# Altium PCB RGBlink.PcbDoc (part 1 of 2)
Units mm, origin at the board's own origin, x right, y up, seen from the top; angles counter-clockwise.
Board outline 49.44 x 43.42 mm, 2 copper layers (Top Layer, Bottom Layer), stack 1.621 mm thick; 42 components, 36 nets, 160 pads, 110 vias.
Unrouted connection lines stored in the file: 1.
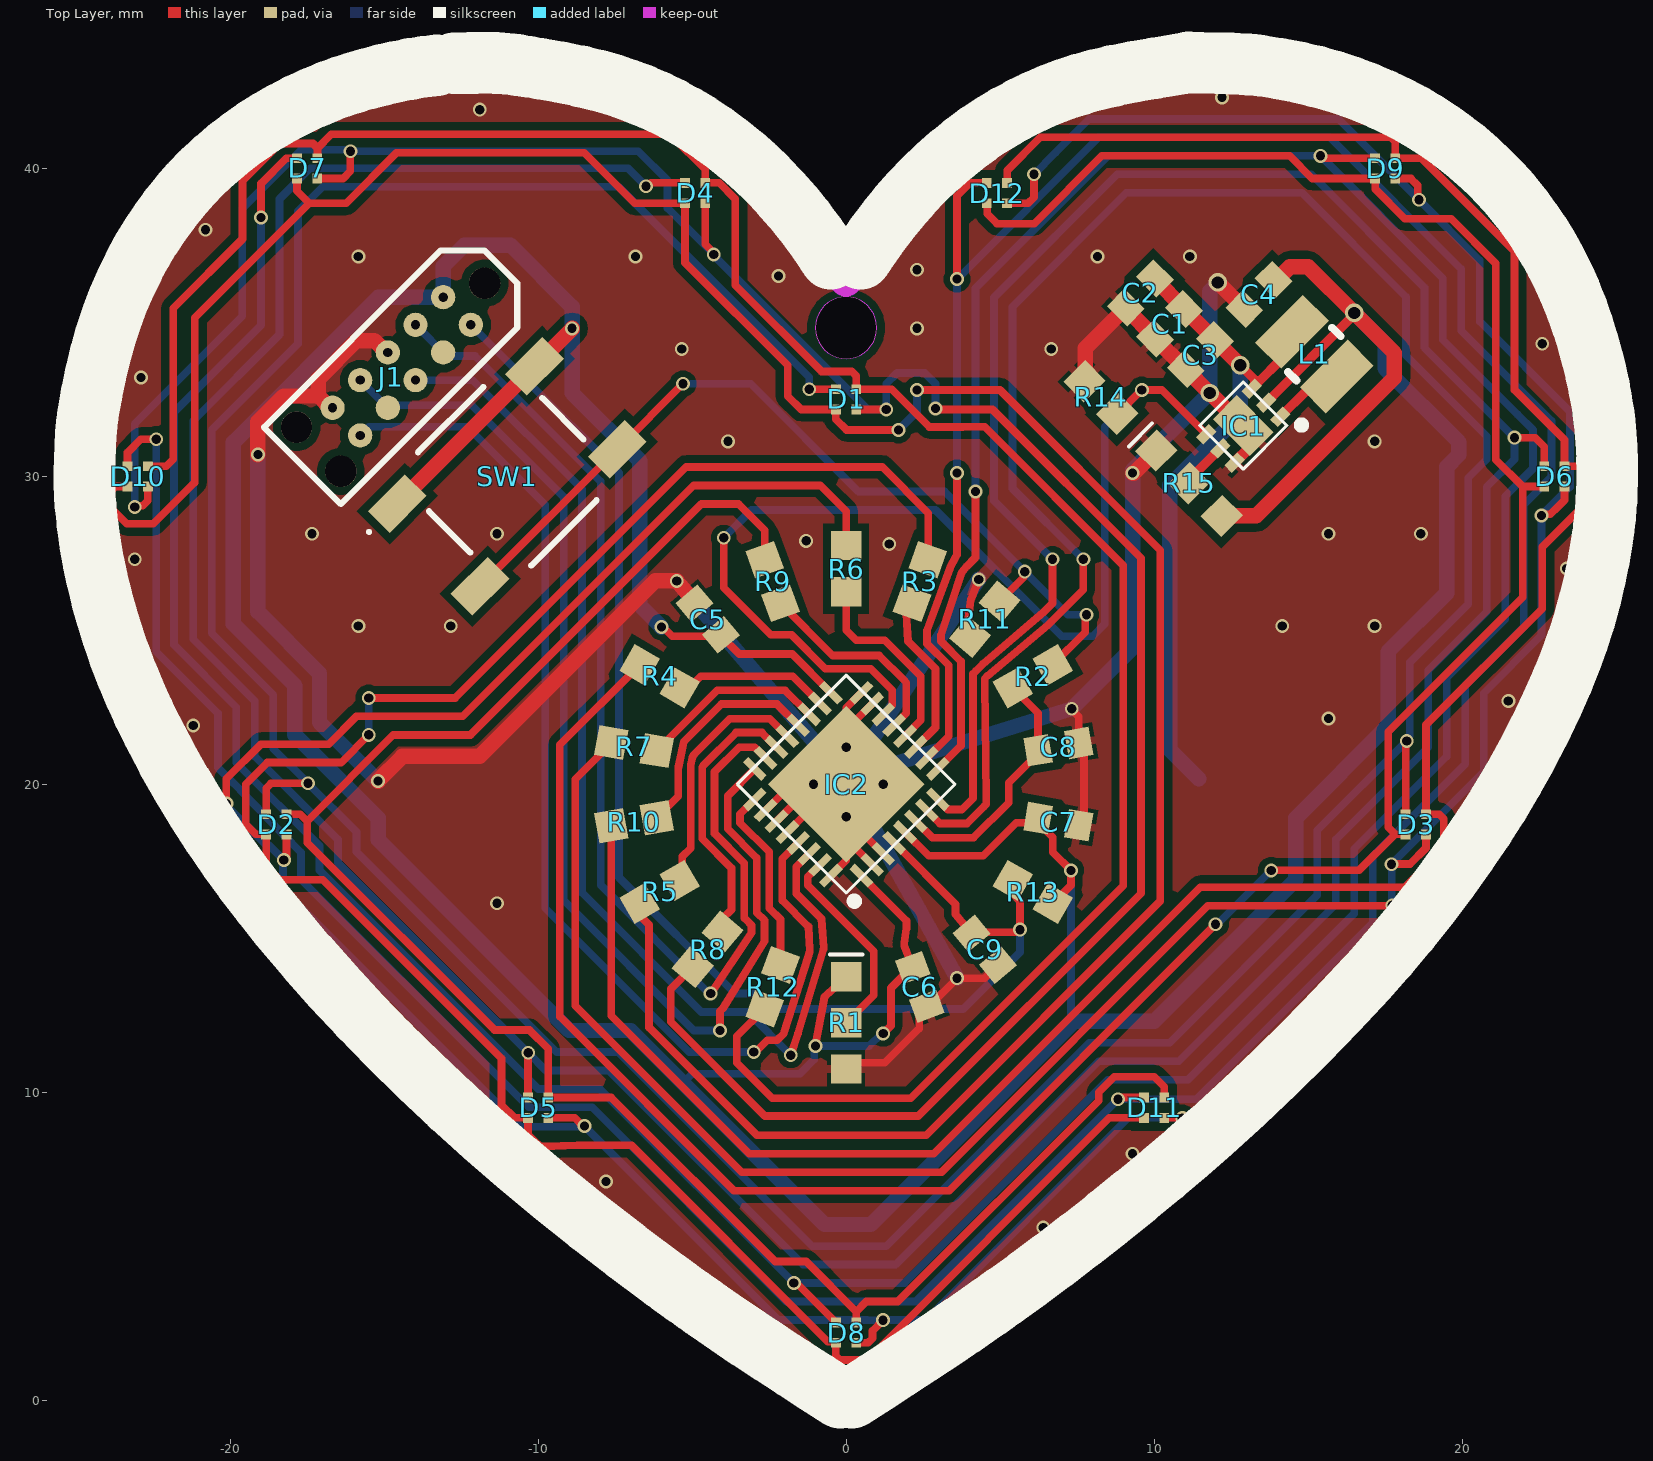
[diagram p0: Top Layer view]
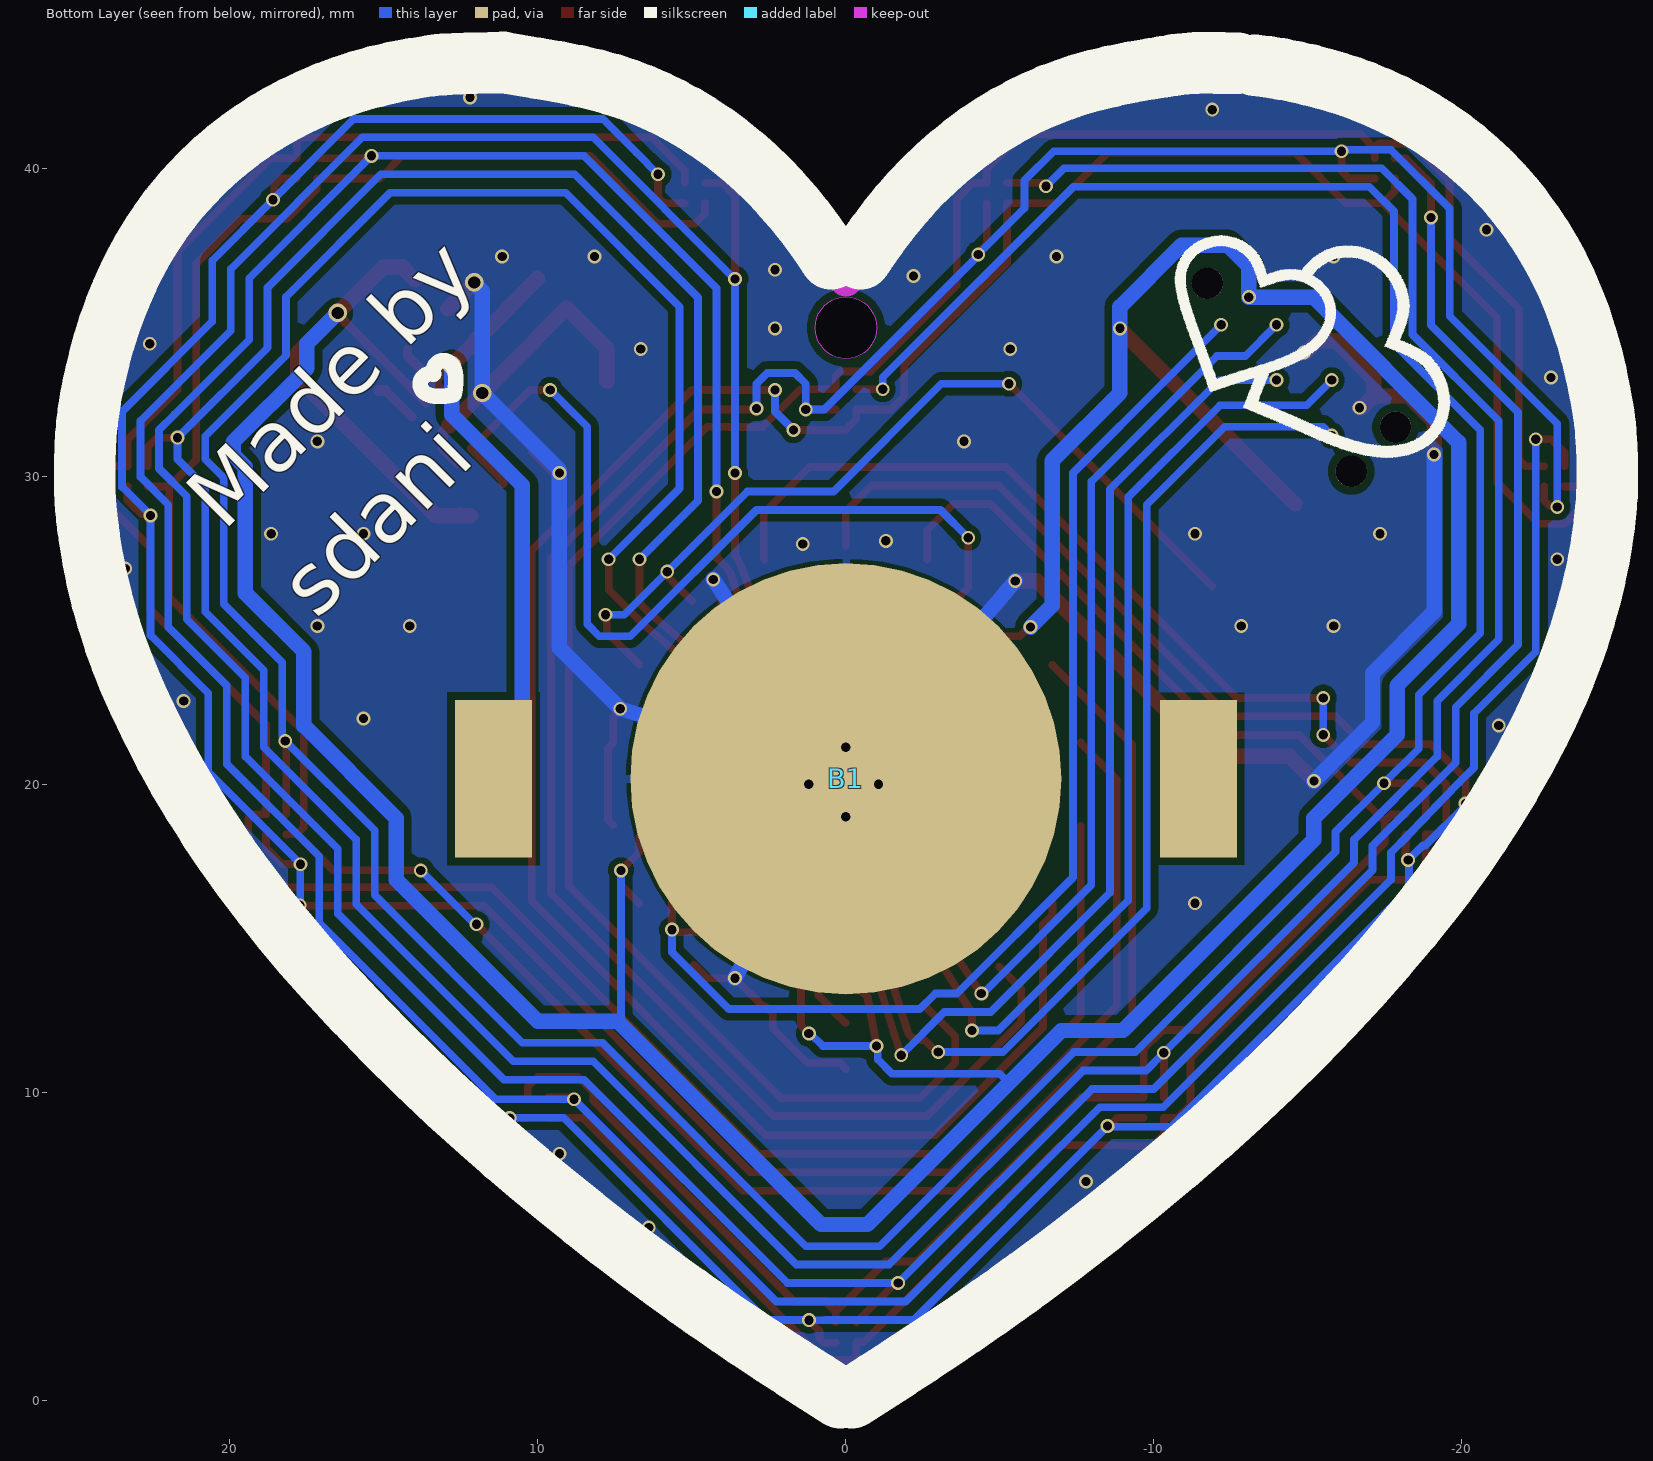
[diagram p1: Bottom Layer view, seen from below]
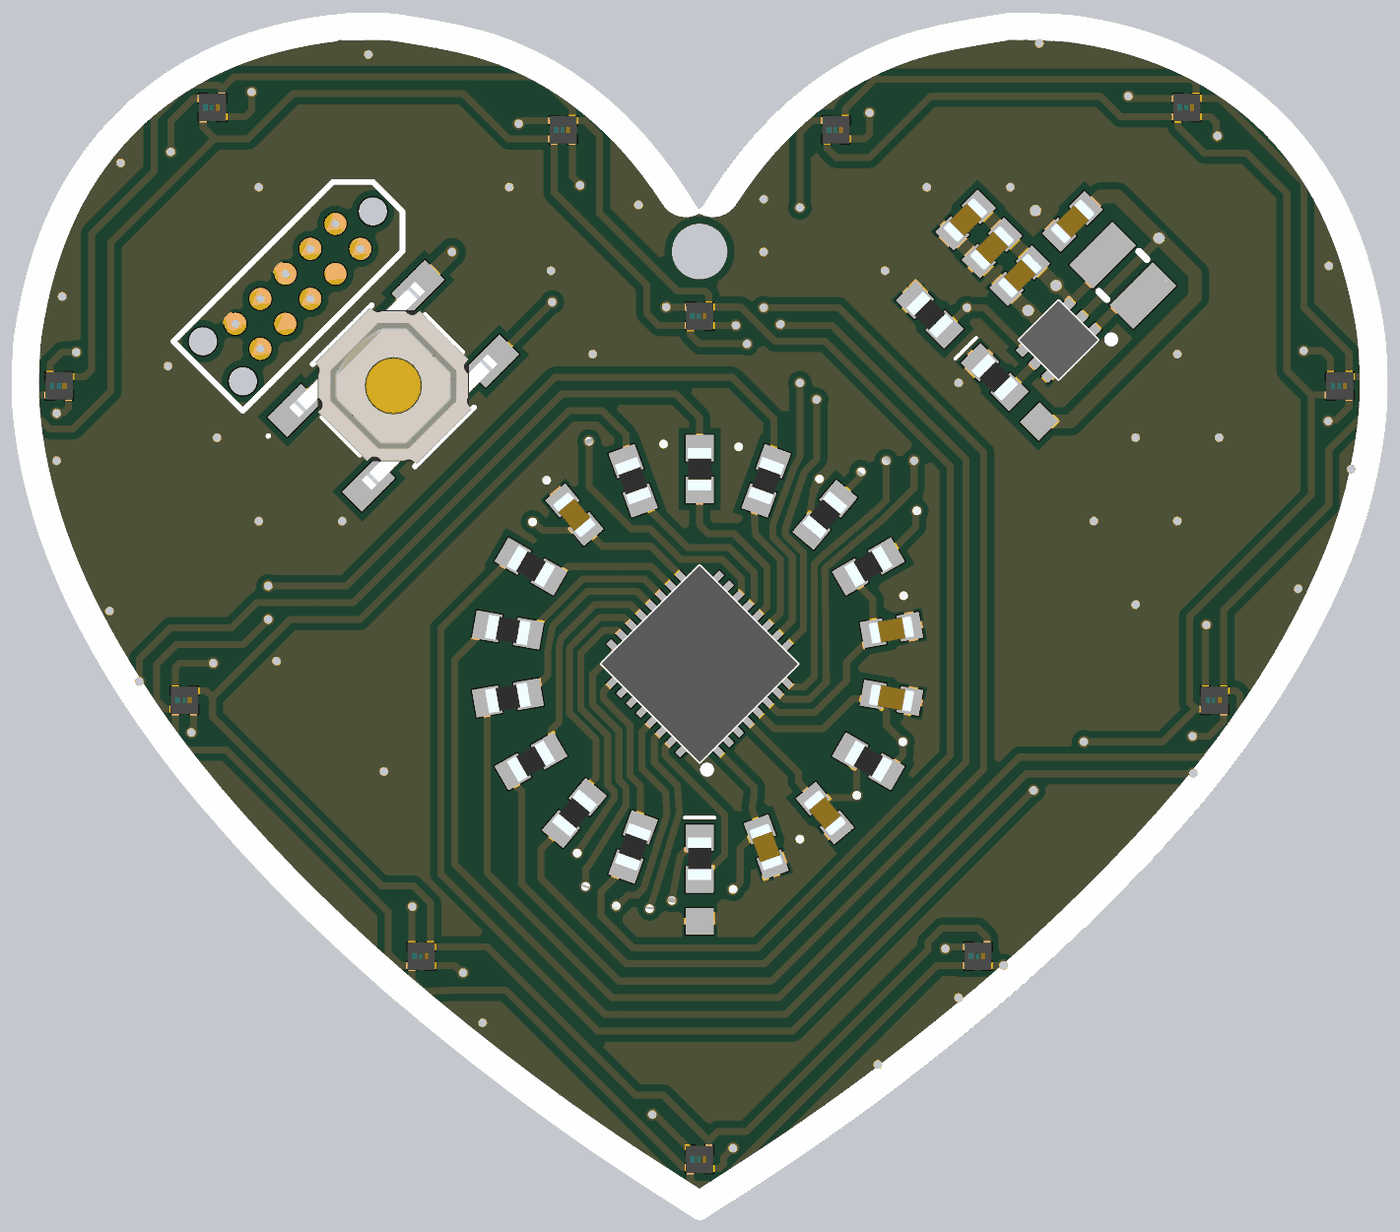
[diagram p3: 3D render of the assembled board from above, using the file's embedded part models]

## Layer stack, top to bottom
Top Solder: solder mask 0.0102, Solder Resist, Dk 3.8
Top Layer: signal copper 0.0356
Dielectric 1: dielectric 1.55, FR-4, Dk 4.8
Bottom Layer: signal copper 0.0356
Bottom Solder: solder mask 0.0102, Solder Resist, Dk 3.8

## Board outline
-23.585,24.173 cw(c-4.492,31.155) -24.307,26.613 cw(c-7.007,30.579) -24.69,29.042 cw(c-15.99,29.798) -24.722,29.701 cw(c-2.55,29.948) -24.715,30.536 cw(c-2.746,29.953) -24.678,31.357 cw(c-17.956,30.927) -24.612,31.96 cw(c-3.326,28.654) -24.356,33.32 cw(c-8.551,29.813) -24.027,34.565 cw(c-10.14,30.301) -23.62,35.717 cw(c-11.595,30.886) -23.127,36.797 cw(c-12.298,31.246) -21.962,38.642 cw(c-12.787,31.62) -20.5,40.222 cw(c-12.735,31.562) -18.765,41.509 cw(c-12.265,30.787) -16.79,42.48 cw(c-12.6,31.652) -15.971,42.762 cw(c-11.215,27.09) -15.061,43.01 cw(c-11.211,27.071) -14.138,43.205 cw(c-12.049,31.695) -13.28,43.328 ccw(c-19.732,104.356) -13.11,43.346 ccw(c-17.889,87.383) -12.954,43.363 ccw(c-18.495,92.772) -12.823,43.378 ccw(c-13.005,44.967) -12.773,43.385 cw(c-12.706,42.933) -12.716,43.39 cw(c-11.291,-19.452) -12.48,43.395 cw(c-11.765,5.761) -12.202,43.399 cw(c-11.483,-18.268) -11.887,43.402 cw(c-11.727,19.104) -11.362,43.399 cw(c-11.423,39.334) -11.034,43.381 cw(c-11.609,37.409) -10.668,43.335 cw(c-24.351,-42.846) -9.917,43.212 cw(c-14.933,13.304) -8.598,42.961 cw(c-11.28,30.404) -7.551,42.691 cw(c-10.552,32.803) -6.623,42.36 cw(c-11.55,30.374) -5.675,41.924 cw(c-10.838,31.774) -4.271,41.078 cw(c-11.754,30.477) -2.953,40.013 cw(c-12.429,29.745) -1.74,38.743 cw(c-14.14,28.305) -0.646,37.284 cw(c-33.71,15.28) -0.485,37.04 cw(c-27.49,19.353) -0.335,36.808 cw(c-26.293,20.121) -0.209,36.612 cw(c-2.01,35.473) -0.151,36.514 ccw(c0.501,36.879) -0.111,36.451 ccw(c0.322,36.754) -0.069,36.397 ccw(c0.233,36.673) -0.028,36.359 ccw(c0,36.393) 0,36.349 ccw(c0,36.393) 0.028,36.359 ccw(c-0.233,36.673) 0.069,36.397 ccw(c-0.321,36.754) 0.111,36.451 ccw(c-0.501,36.88) 0.151,36.514 cw(c2.01,35.473) 0.209,36.611 cw(c26.449,20.022) 0.335,36.808 cw(c27.432,19.391) 0.485,37.04 cw(c33.863,15.178) 0.646,37.284 cw(c14.14,28.304) 1.74,38.743 cw(c12.43,29.744) 2.953,40.013 cw(c11.754,30.476) 4.271,41.078 cw(c10.838,31.773) 5.674,41.924 cw(c11.456,30.559) 6.637,42.365 cw(c10.636,32.569) 7.589,42.701 cw(c11.408,30.001) 8.667,42.977 cw(c15.092,12.562) 10.023,43.232 11.134,43.416 12.09,43.394 cw(c11.617,22.208) 12.488,43.382 cw(c11.566,20.972) 12.891,43.361 cw(c11.717,23.521) 13.247,43.337 cw(c12.969,39.736) 13.474,43.312 cw(c10.943,25.393) 14.703,43.095 cw(c11.817,29.508) 15.835,42.805 cw(c12.08,30.377) 16.902,42.431 cw(c11.96,30.077) 17.94,41.963 cw(c12.616,31.381) 20.126,40.542 cw(c12.861,31.679) 21.929,38.687 cw(c12.403,31.325) 23.307,36.429 cw(c10.107,30.251) 24.239,33.813 cw(c0.731,27.887) 24.454,32.883 cw(c12.382,30.341) 24.594,32.09 cw(c13.618,30.518) 24.676,31.326 cw(c8.83,30.167) 24.716,30.485 cw(c2.245,30.035) 24.719,29.797 cw(c12.807,29.923) 24.698,29.211 cw(c13.262,29.896) 24.649,28.635 cw(c5.423,30.763) 24.566,27.983 cw(c6.107,30.664) 23.269,23.359 cw(c-4.523,35.188) 20.704,18.576 cw(c-12.534,40.464) 16.901,13.679 cw(c-32.55,58.677) 11.876,8.712 cw(c-31.815,57.85) 10.297,7.352 cw(c-52.923,83.162) 8.508,5.895 cw(c-51.364,81.202) 6.715,4.504 cw(c-25.977,47.677) 5.128,3.347 ccw(c49.162,-59.406) 5.023,3.273 ccw(c307.587,-426.366) 4.848,3.15 ccw(c370.729,-515.932) 4.647,3.008 ccw(c340.475,-473.039) 4.446,2.866 cw(c-29.207,50.529) 3.196,2.008 cw(c-57.895,93.486) 1.709,1.032 cw(c-283.02,442.679) 0.187,0.055 cw(c0,0.348) 0,0 cw(c0,0.348) -0.187,0.055 cw(c283.045,442.72) -1.709,1.032 cw(c57.904,93.498) -3.196,2.008 cw(c29.22,50.548) -4.446,2.866 ccw(c-343.694,-477.599) -4.647,3.008 ccw(c-364.806,-507.532) -4.848,3.15 ccw(c-298.418,-413.358) -5.023,3.273 ccw(c-48.77,-58.848) -5.129,3.347 cw(c0.923,11.971) -5.239,3.426 cw(c54.078,85.695) -5.438,3.57 cw(c58.923,92.378) -5.67,3.739 cw(c66.362,102.587) -5.908,3.913 cw(c45.309,73.843) -10.677,7.669 cw(c32.226,58.379) -14.852,11.518 cw(c24.861,51.048) -18.348,15.373 cw(c9.277,38.181) -21.069,19.144 cw(c5.785,35.991) -22.509,21.693 cw(c-1.926,32.094)
cut-out: -1.004,34.819 ccw(c-0.004,34.819) -0.004,33.819 ccw(c-0.004,34.819) 0.996,34.819 ccw(c-0.004,34.819) -0.004,35.819 ccw(c-0.004,34.819)

## Design rules (kind name [scope] priority, off if disabled: settings)
Clearance [All] p1: gap=0.254 ignorepadtopadclearanceinfootprint=FALSE except(0.127: Arc-Arc Arc-Track Arc-SMDPad Track-Track Track-SMDPad; 0.2: Arc-Via Track-Via SMDPad-SMDPad Via-Via Via-Fill Via-Poly Via-Region Via-Text Via-Hole Text-Text Text-Hole)
Height [All] p1: minheight=0 maxheight=40 prefheight=12.7
HoleSize [All] p1: absolutevalues=TRUE maxlimit=5 minlimit=0.3 maxpercent=80.000 minpercent=20.000
MinimumSolderMaskSliver [All] p1: minsoldermaskwidth=0.2
PlaneConnect [All] p1: pad.planeconnectstyle=Relief pad.reliefexpansion=0.508 pad.reliefentries=4 pad.reliefconductorwidth=0.254 pad.reliefairgap=0.254 via.planeconnectstyle=Direct via.reliefexpansion=0.508 via.reliefentries=4 via.reliefconductorwidth=0.254 via.reliefairgap=0.254
PolygonConnect "SW Connect" [InNet('NetL1_2')] p1: connectstyle=Direct reliefconductorwidth=0.254 reliefentries=4 polygonreliefangle="90 Angle" airgapwidth=0.254
PolygonConnect [All] p2: thpad.connectstyle=Relief thpad.reliefconductorwidth=0.254 thpad.reliefentries=4 thpad.polygonreliefangle="90 Angle" thpad.airgapwidth=0.127 smdpad.connectstyle=Relief smdpad.reliefconductorwidth=0.254 smdpad.reliefentries=4 smdpad.polygonreliefangle="90 Angle" smdpad.airgapwidth=0.127 via.connectstyle=Direct via.reliefconductorwidth=0.254 via.reliefentries=4 via.polygonreliefangle="90 Angle" via.airgapwidth=0.127
RoutingVias [All] p1: holewidth=0.3 width=0.45 viastyle="Through Hole" minholewidth=0.3 minwidth=0.45 maxholewidth=1 maxwidth=1.5
SilkToSilkClearance [All] p1: silktosilkclearance=0.15
SilkToSolderMaskClearance [IsPad] p1: minsilkscreentomaskgap=0.15 clearancetoexposedcopper=TRUE
SolderMaskExpansion SolderMaskExpansion_Vias [IsVia] p1: expansion=0.102 istentingtop=TRUE
SolderMaskExpansion [All] p2: expansion=0.05 istentingtop=FALSE
SupplyNets "Schematic Supply Nets_3" [InNet('VBAT')] p1: voltage=0.000
SupplyNets "Schematic Supply Nets_1" [InNet('GND')] p2: voltage=0.000
SupplyNets "Schematic Supply Nets" [InNet('VCC')] p3: voltage=0.000
UnRoutedNet [All] p1: checkbadconnections=TRUE
Width [All] p1: maxlimit=0.5 minlimit=0.2 preferedwidth=0.25
23 further rules are at their usual default settings.

## Components (designator, comment, footprint, x,y, rotation, side; value= is the part's Value field where it differs from the comment)
B1 "Battery cell" BAT_CR2032_SMALL -0.005,20.176 r0 bottom locked
C1 "22uF" CAP0603 10.5,34.95 r45 top
C2 "22uF" CAP0603 9.55,35.95 r45 top
C3 "10uF" CAP0603 11.5,33.95 r45 top
C4 "22uF" CAP0603 13.4,35.9 r45 top
C5 "1uF" CAP0603 -4.5,25.36 r310 top
C6 "1uF" CAP0603 2.39,13.42 r110 top
C7 "1uF" CAP0603 6.89,18.78 r170 top
C8 "1uF" CAP0603 6.89,21.22 r190 top
C9 "1uF" CAP0603 4.5,14.64 r130 top
D1 "UHD111A-FKA-C3K23E1L3VG5ZB3Z3" UHD111A-FKA-C3K23E1L3VG5ZB3Z3 -0.005,32.494 r90 top locked
D2 "UHD111A-FKA-C3K23E1L3VG5ZB3Z3" UHD111A-FKA-C3K23E1L3VG5ZB3Z3 -18.505,18.694 r90 top locked
D3 "UHD111A-FKA-C3K23E1L3VG5ZB3Z3" UHD111A-FKA-C3K23E1L3VG5ZB3Z3 18.495,18.694 r90 top locked
D4 "UHD111A-FKA-C3K23E1L3VG5ZB3Z3" UHD111A-FKA-C3K23E1L3VG5ZB3Z3 -4.905,39.194 r90 top locked
D5 "UHD111A-FKA-C3K23E1L3VG5ZB3Z3" UHD111A-FKA-C3K23E1L3VG5ZB3Z3 -10.005,9.494 r90 top locked
D6 "UHD111A-FKA-C3K23E1L3VG5ZB3Z3" UHD111A-FKA-C3K23E1L3VG5ZB3Z3 22.995,29.994 r90 top locked
D7 "UHD111A-FKA-C3K23E1L3VG5ZB3Z3" UHD111A-FKA-C3K23E1L3VG5ZB3Z3 -17.505,39.994 r90 top locked
D8 "UHD111A-FKA-C3K23E1L3VG5ZB3Z3" UHD111A-FKA-C3K23E1L3VG5ZB3Z3 -0.005,2.194 r90 top locked
D9 "UHD111A-FKA-C3K23E1L3VG5ZB3Z3" UHD111A-FKA-C3K23E1L3VG5ZB3Z3 17.495,39.994 r90 top locked
D10 "UHD111A-FKA-C3K23E1L3VG5ZB3Z3" UHD111A-FKA-C3K23E1L3VG5ZB3Z3 -23.005,29.994 r90 top locked
D11 "UHD111A-FKA-C3K23E1L3VG5ZB3Z3" UHD111A-FKA-C3K23E1L3VG5ZB3Z3 9.995,9.494 r90 top locked
D12 "UHD111A-FKA-C3K23E1L3VG5ZB3Z3" UHD111A-FKA-C3K23E1L3VG5ZB3Z3 4.895,39.194 r90 top locked
IC1 "TPS61291DRVR" WSON-6 12.892,31.642 r225 top
IC2 "STM32U073KCU6" UFQFPN32-5x5 0,20 r135 top locked
J1 "TC2050" TC2050-NL -11.738,36.262 r225 top locked
L1 "Inductor" IND1008 15.2,34 r135 top value=3.3uH
R1 "10K" RES0603_SELECTION 0,13 r270 top
R2 "1K" RES0603 6.06,23.5 r30 top
R3 "4.7K" RES0603 2.39,26.58 r70 top
R4 "4.7K" RES0603 -6.06,23.5 r150 top
R5 "4.7K" RES0603 -6.06,16.5 r210 top
R6 "4.7K" RES0603 0,27 r90 top
R7 "4.7K" RES0603 -6.89,21.22 r170 top
R8 "4.7K" RES0603 -4.5,14.64 r230 top
R9 "4.7K" RES0603 -2.39,26.58 r110 top
R10 "4.7K" RES0603 -6.89,18.78 r190 top
R11 "10K" RES0603 4.5,25.36 r50 top
R12 "4.7K" RES0603 -2.39,13.42 r250 top
R13 "10K" RES0603 6.06,16.5 r330 top
R14 "10K" RES0603 8.27,32.555 r315 top
R15 "0R" RES0603_SELECTION 10.6,30.3 r315 top
SW1 "TS18-5-25-SL-260-SMT-TR" BUTTON_LP_5x5 -11.005,29.994 r45 top locked

## Footprints (in the part's own frame and the unit in brackets; to place one, negate y for a bottom-side part, rotate by r counter-clockwise, add the part's x,y. Pads: shape width x height; smd on the part's side, far side on the other; paste and mask are expansions set on the pad)
BAT_CR2032_SMALL [mm]
  rect 2.5x5.1 smd mask+0: +(-11.45,0) +(11.45,0)
  round 14 smd paste-8.9 mask+0: -(0,0)
  body extent -11.43,-10 11.43,10, height 4.32
BUTTON_LP_5x5 [mm]
  rect 1.7x1 smd: 1(-3.15,1.9) 1(3.15,1.9) 2(-3.15,-1.9) 2(3.15,-1.9)
  silkscreen extent -4.5,-2.6 2.6,2.6, body extent -3.2,-2.6 3.2,2.6, height 2.5
CAP0603 [mm] "1.6 x 0.8 x 0.8 mm"
  rect 0.81x0.94 smd: 1(-0.67,0) 2(0.67,0)
  body extent -0.8,-0.4 0.8,0.4, height 0.9
IND1008 [mm]
  rect 1.199x2.2 smd: 1(1.002,0.027) 2(-1.056,0.027)
  silkscreen extent -0.23,-0.99 0.17,1.04, body extent -1.28,-0.97 1.22,1.03, height 1
RES0603 [mm] "Resistor 0603 (1608 metric)"
  rect 0.95x1 smd: 1(-0.75,0) 2(0.75,0)
  body extent -0.76,-0.42 0.76,0.42, height 0.45
RES0603_SELECTION [mm] "Resistor 0603 (1608 metric)"
  rect 0.95x1 smd: 1(-0.75,0) 2(0.75,0) 3(2.25,0)
  silkscreen extent -1.47,-0.53 -1.47,0.53, body extent -0.76,-0.43 0.76,0.43, height 0.45
TC2050-NL [mil] "TAG CONNECT PLUG  OF NAILS VICTIM AND PLUG BODY"
  round 31 smd paste-40: 1(50,-25) 2(100,-25) 3(150,-25) 4(200,-25) 5(250,-25) 6(250,25) 7(200,25) 8(150,25) 9(100,25) 10(50,25)
  round 40 hole 40 unplated: A(0,0) B(300,40) C(300,-40)
  silkscreen extent -30,-70 330,70
UFQFPN32-5x5 [mm]
  rect 0.85x0.25 smd: 1(-2.45,1.75) 2(-2.45,1.25) 3(-2.45,0.75) 4(-2.45,0.25) 5(-2.45,-0.25) 6(-2.45,-0.75) 7(-2.45,-1.25) 8(-2.45,-1.75) 17(2.45,-1.75) 18(2.45,-1.25) 19(2.45,-0.75) 20(2.45,-0.25) 21(2.45,0.25) 22(2.45,0.75) 23(2.45,1.25) 24(2.45,1.75)
  rect 0.25x0.85 smd: 9(-1.75,-2.45) 10(-1.25,-2.45) 11(-0.75,-2.45) 12(-0.25,-2.45) 13(0.25,-2.45) 14(0.75,-2.45) 15(1.25,-2.45) 16(1.75,-2.45) 25(1.75,2.45) 26(1.25,2.45) 27(0.75,2.45) 28(0.25,2.45) 29(-0.25,2.45) 30(-0.75,2.45) 31(-1.25,2.45) 32(-1.75,2.45)
  rect 3.6x3.6 smd: 33(0,0)
  silkscreen extent -3,-2.5 2.5,2.62, body extent -2.5,-2.5 2.5,2.5, height 0.6
UHD111A-FKA-C3K23E1L3VG5ZB3Z3 [mm] "RGB 1x1mm LED"
  rect 0.32x0.32 smd: 1(-0.331,0.33) 2(-0.331,-0.331) 3(0.33,-0.331) 4(0.33,0.33)
  body extent -0.5,-0.5 0.5,0.5, height 0.6
WSON-6 [mm]
  rect 0.6x0.35 smd: 1(-1.05,0.65) 2(-1.05,0) 3(-1.05,-0.65) 4(1.05,-0.65) 5(1.05,0) 6(1.05,0.65)
  rect 1.1x1.7 smd: 7(0,0)
  silkscreen extent -1.47,-1 1,1.45, body extent -1,-1 1,1, height 0.8

## Part data
C1 C2 C3 C4 C5 C6 C7 C8 C9: "Capacitor"
D1 D2 D3 D4 D5 D6 D7 D8 D9 D11 D12: Supplier Part Number=941-UHD1AA3K3E3V53Z3
D10: LCSC Part Number=C5333730, Supplier Part Number=941-UHD1AA3K3E3V53Z3
IC1: "Integrated Circuit", LCSC Part Number=C464809, Manufacturer_Name="Texas Instruments", Mouser Part Number=595-TPS61291DRVR, Arrow Part Number=TPS61291DRVR, Arrow Price/Stock=https://www.arrow.com/en/products/tps61291drvr/texas-instruments?utm_currency=USD&region=nac, Datasheet Link=http://www.ti.com/lit/ds/symlink/tps61291.pdf, Height=0.8mm, Manufacturer_Part_Number=TPS61291DRVR, Mouser Price/Stock=https://www.mouser.co.uk/ProductDetail/Texas-Instruments/TPS61291DRVR?qs=6E8igxPflKdi99VfHtbMIA%3D%3D
IC2: "Integrated Circuit", Manufacturer_Name=STMicroelectronics, Mouser Part Number=511-STM32U073KCU6, Datasheet Link=https://www.st.com/resource/en/datasheet/stm32u073c8.pdf, Height=0.6mm, Manufacturer_Part_Number=STM32U073KCU6, Mouser Price/Stock=https://www.mouser.co.uk/ProductDetail/STMicroelectronics/STM32U073KCU6?qs=dbcCsuKDzFVf3x6MF6CcAQ%3D%3D
J1: "TC2050 JTAG CONNECTOR DNP"
L1: library part 3.3uH, "General Purpose Inductor, 4.7uH, 20%, 1 Element, Ferrite-Core, SMD, 1608M", Case/Size Code=1608-M, DC Resistance (DCR)=500mR, Inductance-Nom (L)=4.7uH, Inductor Application="POWER INDUCTOR", Inductor Type="GENERAL PURPOSE INDUCTOR", Manufacturer=TDK, Manufacturer Part Number=MLZ1608E4R7MT, Manufacturer Series=MLZ, Max Current Rating=350mA, Max Operating Temperature=125°C, Min Operating Temperature=-55°C, Package Height=0.8mm, Package Length=1.6mm, Package Style=SMTMeter, Self Resonant Frequency=80MHz, Supplier Part Number=810-MLZ1608E4R7MT, Test Frequency=2MHz, Tolerance=20%, Category="Fixed Inductors", Channels=1, ComponentLink1Description=https://datasheet.ciiva.com:443/pdfs/VipMasterIC/IC/TDKC/TDKCS08829/TDKCS08829-1.pdf?src-supplier=IHS+Markit, ComponentLink1URL=https://datasheet.ciiva.com:443/pdfs/VipMasterIC/IC/TDKC/TDKCS08829/TDKCS08829-1.pdf?src-supplier=IHS+Markit, ComponentLink2Description=https://datasheet.ciiva.com/11802/0900766b8082f86f-11802261.pdf?src-supplier=Rs, ComponentLink2URL=https://datasheet.ciiva.com/11802/0900766b8082f86f-11802261.pdf?src-supplier=Rs, Construction="Magnetic Shielded", Core Material=Ferrite, JESD-609 Code=e3, Package Width=0.8mm, Packaging="Tape and Reel", Pins=2, Pricing="1=0.1, 10=0.063, 50=0.063, 100=0.053, 1000=0.047, 10000=0.038 (USD)", Reach SVHC Compliant=Yes, RoHS=Yes, RoHS Compliant=Yes, Series=MLZ1608, Shape/Size Description="RECTANGULAR PACKAGE", Shielding=Shielded, Stock=10382, Supplier=Mouser, Surface Mount=Yes, Terminal Finish=Tin, Terminal Placement="Dual Ended", Termination=Wraparound
R1: library part Resistor_Selection, "Resistor selection between 2 value.", LCSC Part Number=C2906974
R2: "Fixed Resistor, Metal Glaze/thick Film, 0.1W, 1000ohm, 75V, 1% +/-Tol, 100ppm/Cel, Surface Mount, 0603", Case/Package=0603, Manufacturer=Bourns, Manufacturer Part Number=CR0603-FX-1001ELF, Max Operating Temperature=155°C, Min Operating Temperature=-55°C, Package Height=0.45mm, Package Length=1.6mm, Package Shape=Rectangular, Package Width=0.8mm, Rated Temperature=70°C, Resistor Type="FIXED RESISTOR", Supplier Part Number=652-CR0603FX-1001ELF, Temperature Coefficient=100ppm/°C, Working Voltage=50V, Category="Chip SMD Resistors", ComponentLink1Description=https://datasheet.ciiva.com:443/pdfs/VipMasterIC/IC/BOUR/BOUR-S-A0009069624/BOUR-S-A0009069624-1.pdf?src-supplier=IHS+Markit, ComponentLink1URL=https://datasheet.ciiva.com:443/pdfs/VipMasterIC/IC/BOUR/BOUR-S-A0009069624/BOUR-S-A0009069624-1.pdf?src-supplier=IHS+Markit, ComponentLink2Description=https://datasheet.ciiva.com/11808/0900766b80fcdb72-11808035.pdf?src-supplier=Rs, ComponentLink2URL=https://datasheet.ciiva.com/11808/0900766b80fcdb72-11808035.pdf?src-supplier=Rs, ComponentLink3Description=https://datasheet.ciiva.com/19466/774882-19466523.pdf?src-supplier=Jameco, ComponentLink3URL=https://datasheet.ciiva.com/19466/774882-19466523.pdf?src-supplier=Jameco, ComponentLink4Description=https://datasheet.ciiva.com/7001/1902866-7001622.pdf?src-supplier=Newark, ComponentLink4URL=https://datasheet.ciiva.com/7001/1902866-7001622.pdf?src-supplier=Newark, ComponentLink5Description=https://datasheet.ciiva.com/7986/691949-7986156.pdf?src-supplier=Element14, ComponentLink5URL=https://datasheet.ciiva.com/7986/691949-7986156.pdf?src-supplier=Element14, ComponentLink6Description=https://datasheet.ciiva.com/22693/1902866-22693205.pdf?src-supplier=Element14, ComponentLink6URL=https://datasheet.ciiva.com/22693/1902866-22693205.pdf?src-supplier=Element14, ComponentLink7Description=https://datasheet.ciiva.com/5546/chpreztr-5546283.pdf?src-supplier=Mouser, ComponentLink7URL=https://datasheet.ciiva.com/5546/chpreztr-5546283.pdf?src-supplier=Mouser, ComponentLink8Description=https://datasheet.ciiva.com/16757/70154685-16757482.pdf?src-supplier=Allied+Electronics, ComponentLink8URL=https://datasheet.ciiva.com/16757/70154685-16757482.pdf?src-supplier=Allied+Electronics, ComponentLink9Description=https://datasheet.ciiva.com/3255/chpreztr-3255917.pdf?src-supplier=Avnet, ComponentLink9URL=https://datasheet.ciiva.com/3255/chpreztr-3255917.pdf?src-supplier=Avnet, ComponentLink10Description=https://datasheet.ciiva.com/6547/chpreztr-6547350.pdf?src-supplier=Digikey, ComponentLink10URL=https://datasheet.ciiva.com/6547/chpreztr-6547350.pdf?src-supplier=Digikey, ComponentLink11Description=https://datasheet.ciiva.com/6547/chpreztr-6547351.pdf?src-supplier=Digikey, ComponentLink11URL=https://datasheet.ciiva.com/6547/chpreztr-6547351.pdf?src-supplier=Digikey, ComponentLink12Description=https://datasheet.ciiva.com/6547/chpreztr-6547349.pdf?src-supplier=Digikey, ComponentLink12URL=https://datasheet.ciiva.com/6547/chpreztr-6547349.pdf?src-supplier=Digikey, ComponentLink13Description=https://datasheet.ciiva.com/30115/159chpreztr-30115222.pdf?src-supplier=Onlinecomponents.com, ComponentLink13URL=https://datasheet.ciiva.com/30115/159chpreztr-30115222.pdf?src-supplier=Onlinecomponents.com, Construction=Chip, JESD-609 Code=e3, Mounting Technology="Surface Mount", Packaging="Tape and Reel", Pins=2, Pricing="1=0.1, 10=0.009, 50=0.009, 100=0.005, 1000=0.004, 10000=0.002 (USD)", Reach SVHC Compliant=Yes, RoHS=Yes, RoHS Compliant=Yes, Stock=320220, Technology="RUTHENIUM OXIDE", Terminal Finish=Nickel, Termination=Wraparound
R3 R4 R5 R6 R7 R8 R9 R10 R12: "Resistor"
R11 R13 R14: "Fixed Resistor, Metal Glaze/thick Film, 0.1W, 10000ohm, 75V, 1% +/-Tol, 100ppm/Cel, Surface Mount, 0603", Case/Package=0603, Manufacturer=Bourns, Manufacturer Part Number=CR0603-FX-1002ELF, Max Operating Temperature=155°C, Min Operating Temperature=-55°C, Package Height=0.45mm, Package Length=1.6mm, Package Shape=Rectangular, Package Width=0.8mm, Rated Temperature=70°C, Resistor Type="FIXED RESISTOR", Supplier Part Number=652-CR0603FX-1002ELF, Temperature Coefficient=100ppm/°C, Working Voltage=50V, Category="Chip SMD Resistors", ComponentLink1Description=https://datasheet.ciiva.com:443/pdfs/VipMasterIC/IC/BOUR/BOUR-S-A0009069624/BOUR-S-A0009069624-1.pdf?src-supplier=IHS+Markit, ComponentLink1URL=https://datasheet.ciiva.com:443/pdfs/VipMasterIC/IC/BOUR/BOUR-S-A0009069624/BOUR-S-A0009069624-1.pdf?src-supplier=IHS+Markit, ComponentLink2Description=https://datasheet.ciiva.com/11808/0900766b80fcdb72-11808032.pdf?src-supplier=Rs, ComponentLink2URL=https://datasheet.ciiva.com/11808/0900766b80fcdb72-11808032.pdf?src-supplier=Rs, ComponentLink3Description=https://datasheet.ciiva.com/27049/774903-27049975.pdf?src-supplier=Jameco, ComponentLink3URL=https://datasheet.ciiva.com/27049/774903-27049975.pdf?src-supplier=Jameco, ComponentLink4Description=https://datasheet.ciiva.com/22644/1849498-22644171.pdf?src-supplier=Element14, ComponentLink4URL=https://datasheet.ciiva.com/22644/1849498-22644171.pdf?src-supplier=Element14, ComponentLink5Description=https://datasheet.ciiva.com/22693/1902866-22693206.pdf?src-supplier=Element14, ComponentLink5URL=https://datasheet.ciiva.com/22693/1902866-22693206.pdf?src-supplier=Element14, ComponentLink6Description=https://datasheet.ciiva.com/5548/chpreztr-5548911.pdf?src-supplier=Mouser, ComponentLink6URL=https://datasheet.ciiva.com/5548/chpreztr-5548911.pdf?src-supplier=Mouser, ComponentLink7Description=https://datasheet.ciiva.com/16757/70154685-16757483.pdf?src-supplier=Allied+Electronics, ComponentLink7URL=https://datasheet.ciiva.com/16757/70154685-16757483.pdf?src-supplier=Allied+Electronics, ComponentLink8Description=https://datasheet.ciiva.com/3255/chpreztr-3255918.pdf?src-supplier=Avnet, ComponentLink8URL=https://datasheet.ciiva.com/3255/chpreztr-3255918.pdf?src-supplier=Avnet, ComponentLink9Description=https://datasheet.ciiva.com/7001/1902866-7001623.pdf?src-supplier=Newark, ComponentLink9URL=https://datasheet.ciiva.com/7001/1902866-7001623.pdf?src-supplier=Newark, Construction=Chip, JESD-609 Code=e3, Mounting Technology="Surface Mount", Packaging="Tape and Reel", Pins=2, Pricing="1=0.1, 10=0.009, 50=0.009, 100=0.005, 1000=0.004, 10000=0.002 (USD)", Reach SVHC Compliant=Yes, RoHS=Yes, RoHS Compliant=Yes, Stock=335503, Technology="RUTHENIUM OXIDE", Terminal Finish=Nickel, Termination=Wraparound
R15: library part Resistor_Selection, "Resistor selection between 2 value."
SW1: "Switch", Manufacturer_Name="Same Sky", Supplier Part Number=179-TS18525SL260SMTT, Datasheet Link=https://www.sameskydevices.com/product/resource/supplyframepdf/ts18.pdf, Height=2.7mm, Manufacturer_Part_Number=TS18-5-25-SL-260-SMT-TR, Mouser Price/Stock=https://www.mouser.co.uk/ProductDetail/Same-Sky/TS18-5-25-SL-260-SMT-TR?qs=tlsG%2FOw5FFh0yS4gYnfcwg%3D%3D

## Via types
v1: diameter 0.45, hole 0.3, Top Layer to Bottom Layer, tented both sides, 106 vias
v2: diameter 0.6, hole 0.4, Top Layer to Bottom Layer, tented both sides, 4 vias

## Nets (pads, with @x,y where several pads share a name; then routed paths per layer and width w, separated by ;. In a path a pad name is that pad's centre, name@x,y a point inside that pad or via, vN(x,y) a via of type N, cw(c..) or ccw(c..) an arc to the next point about the centre after c; other vN are vias at no path point)
BTN: C8.2 IC2.6 R2.1 | length 8.2
  Top Layer w0.25: IC2.6@2.263,18.798 2.804,18.257 4.132,18.257 5.275,19.4 5.275,20.05 6.23,21.005 6.23,22.305 R2.1@5.41,23.125
EN_3V3: IC1.4 IC2.14 R14.2 | length 35.9
  Top Layer w0.25: v1(-3.975,28) -3.975,26.375 -2.45,24.85 -1.775,24.85 -0.675,23.75 0.8,23.75 1.5,23.05 1.5,22.561 IC2.14@1.202,22.263 ; R14.2@8.8,32 v1(9.6,32.8) 10.25,32.8 IC1.4@11.69,31.36
  Bottom Layer w0.25: v1(-3.975,28) -3.075,28.9 2.9,28.9 7,24.8 8,24.8 8.4,25.2 8.4,31.6 v1(9.6,32.8)
GND: B1.- C1.1 C2.1 C3.1 C4.1 C5.1 C6.1 C7.1 C8.1 C9.1 IC1.6 IC1.7 IC2.2 IC2.3 IC2.15 IC2.16 IC2.26 IC2.27 IC2.28 IC2.32 IC2.33 J1.3 J1.5 R1.3 R11.1 R14.1 R15.1 | length 117
  Top Layer w0.25: IC2.26@-2.616,19.151 -1.768,20 v1(-1.061,20) IC2.27@-2.263,18.798 ; IC2.28@-1.909,18.444 IC2.33@-0.354,20 ; IC2.32@-0.495,17.03 0,17.525 0,18.232 IC2.2@0.849,17.384 ; R1.3@0,10.75 0.2,10.95 1.25,10.95 2.368,12.068 2.368,12.539 C6.1@2.619,12.79 ; v1(0,18.939) IC2.3@1.202,17.737 ; IC2.16@0.495,22.97 0,22.475 0,21.768 IC2.15@0.849,22.616 ; C6.1@2.69,12.79 v1(3.6,13.7) 4.504,13.7 C9.1@4.931,14.127 ; R11.1@4.018,24.785 3.956,25.295 4.042,25.984 v1(4.303,26.649) ; v1(7.325,22.45) 7.325,22.413 7.55,22.188 C8.1@7.55,21.336 7.725,21.161 7.725,18.839 C7.1@7.55,18.664
  Top Layer w0.35: IC1.6@12.61,30.44 13.087,30.918 IC1.7@13.087,31.448
  Top Layer w0.5: v1(-19.1,30.7) -19.1,31.768 -18.264,32.604 -17.139,32.604 ; v1(-16.678,32.221) -16.755,32.221 -17.139,32.604 ; v1(-15.2,20.1) -15.2,20.11 -14.41,20.9 -11.9,20.9 -6.2,26.6 v1(-5.5,26.6) -5.087,26.108 C5.1@-4.931,25.873 ; v1(-14.882,34.017) -14.935,34.017 -15.318,34.4 -15.9,34.4 -17.139,33.161 -17.139,32.604 ; R14.1@7.739,33.086 7.757,33.103 7.757,34.15 9.067,35.46 10.035,34.492 10.042,34.492 10.042,34.46 C3.1@11.01,33.492 ; v1(9.3,30.1) 9.339,30.1 R15.1@10.07,30.83 ; C3.1@11.026,33.476 v2(11.8,32.7) ; v2(11.8,32.7) 11.817,32.7 12.875,31.642 IC1.7@12.892,31.642 ; v2@12.072,36.281 C4.1@12.926,35.426
  Bottom Layer w0.5: v1(-19.1,30.7) -19.1,25.6 -17.1,23.6 -17.1,22 v1(-15.2,20.1) ; v1(-5.5,26.6) B1.-@-0.005,20.176 ; B1.-@0.071,20.04 v1(3.6,13.7) ; v1(4.303,26.649) B1.-@-0.005,20.176 ; v2(12.062,36.29) 12.062,36.263 11.8,36.001 v2(11.8,32.7) 9.3,30.2 v1(9.3,30.1) 9.3,24.425 v1(7.325,22.45) B1.-@-0.005,20.176
  other v1: 6.4,5.6 -7.8,7.1 9.3,8 -11.341,16.131 1.2,20 0,21.2 -21.2,21.9 15.659,22.131 21.5,22.7 -15.841,25.131 -12.841,25.131 14.159,25.131 17.159,25.131 23.4,27 -23.1,27.3 1.4,27.8 -1.3,27.9 -17.341,28.131 -11.341,28.131 15.659,28.131 18.659,28.131 -3.841,31.131 17.159,31.131 -22.9,33.2 -5.341,34.131 6.659,34.131 22.6,34.3 2.3,34.8 -2.2,36.5 2.3,36.7 -15.841,37.131 -6.841,37.131 8.159,37.131 11.159,37.131 -20.8,38 -11.9,41.9 12.2,42.3
LED_A.0: D1.4 D2.4 D3.4 IC2.7 | length 149.9
  Top Layer w0.25: D2.4@-18.834,19.023 -18.834,19.866 -18.673,20.027 v1(-17.473,20.027) ; v1(-1.2,32.823) D1.4@-0.334,32.823 ; IC2.7@2.616,19.151 3.043,18.725 3.925,18.725 4.477,19.277 4.55,19.35 4.55,19.557 4.497,23.253 4.497,23.425 4.586,23.515 6.557,25.175 7.7,26.318 v1(7.7,27.3) ; D3.4@18.166,19.023 18.166,21.366 v1(18.2,21.4)
  Bottom Layer w0.25: v1(-17.473,20.027) -18.6,21.154 -18.6,22.9 -20.6,24.9 -20.6,31.5 -17.8,34.3 -17.8,38.6 -17,39.4 -7.392,39.4 -1.2,33.208 v1(-1.2,32.823) ; v1@-17.446,20 -15.9,18.454 -15.9,17.8 -9.4,11.3 -7.4,11.3 -1.1,5 1.3,5 7.9,11.6 10.5,11.6 15.3,16.4 15.3,18.504 18.196,21.4 v1(18.2,21.4) 18.2,21.454 18.3,21.554 18.3,23.949 20.2,25.849 20.2,28.725 20.2,29.95 20.8,30.55 20.8,31.3 18.175,33.925 18.175,35.825 14.8,39.2 9.1,39.2 5.4,35.5 5.4,29.6 v1(7.7,27.3)
LED_A.1: D4.4 D5.4 D6.4 IC2.8 | length 144.8
  Top Layer w0.25: D5.4@-10.334,9.823 -10.334,11.266 v1(-10.323,11.277) ; v1(-6.5,39.413) -6.446,39.413 -6.335,39.523 D4.4@-5.234,39.523 ; IC2.8@2.97,19.505 3.3,19.175 3.75,19.175 4.12,19.545 4.12,23.581 4.209,23.671 4.43,23.892 4.446,23.905 6.418,25.594 6.432,25.607 6.7,25.875 v1(6.7,27.3) ; v1(21.7,31.25) 22.371,31.25 22.666,30.955 D6.4@22.666,30.323
  Bottom Layer w0.25: v1(-6.5,39.413) -7.085,39.998 -17.402,39.998 -18.4,39 -18.4,34.6 -21.2,31.8 -21.2,24.7 -19.2,22.7 -19.2,20.9 -16.5,18.2 -16.5,17.454 v1(-10.323,11.277) -9.746,10.7 -7.7,10.7 -1.4,4.4 1.6,4.4 8.2,11 10.8,11 15.9,16.1 15.9,18.2 18.9,21.2 18.9,23.7 20.8,25.6 20.8,27.625 20.8,29.65 21.7,30.55 v1(21.7,31.25) 18.775,34.175 18.775,36.125 15.1,39.8 8.8,39.8 4.8,35.8 4.8,29.2 v1(6.7,27.3)
LED_A.2: D7.4 D8.4 D9.4 IC2.9 | length 134.1
  Top Layer w0.25: v1(-19.004,38.4) -19,38.404 -19,39.5 -18.181,40.319 -17.838,40.319 D7.4@-17.834,40.323 ; v1(-1.7,3.804) -1.662,3.766 -1.577,3.766 D8.4@-0.334,2.523 ; IC2.9@2.97,20.495 3.725,21.25 3.725,23.991 3.151,24.565 3.078,24.639 3.078,24.844 3.753,26.877 3.907,27.065 4.2,27.358 v1(4.2,29.5) ; v1(15.4,40.4) 15.454,40.4 15.531,40.323 D9.4@17.166,40.323
  Bottom Layer w0.25: v1(-19.004,38.4) -19,38.396 -19,34.9 -21.825,32.075 -21.825,24.525 -19.8,22.5 -19.8,20.7 -17.1,18 -17.1,17.2 -10,10.1 -7.996,10.1 v1(-1.7,3.804) 1.904,3.804 8.5,10.4 11.1,10.4 16.5,15.8 16.5,17.9 19.5,20.9 19.5,23.451 21.4,25.351 21.4,29.35 22.3,30.25 22.3,30.996 22.304,31 22.304,31.5 21.804,32 21.8,32 19.375,34.425 19.375,36.425 v1(15.4,40.4) 8.5,40.4 4.2,36.1 v1(4.2,29.5)
LED_A.3: D10.4 D11.4 D12.4 IC2.10 | length 131
  Top Layer w0.25: D10.4@-23.334,30.323 -23.334,30.766 -22.9,31.2 v1(-22.4,31.2) ; IC2.10@2.616,20.849 3.329,21.561 3.329,23.854 2.625,24.558 2.625,24.943 2.625,24.99 3.376,27.033 3.57,27.395 3.6,27.45 v1(3.6,30.1) ; v1(3.6,36.4) 3.6,39.1 4.023,39.523 D12.4@4.566,39.523 ; v1(8.825,9.767) 8.879,9.767 8.936,9.823 D11.4@9.666,9.823
  Bottom Layer w0.25: v1(-22.4,31.2) -22.4,24.3 -20.4,22.3 -20.4,20.542 -19.951,20.092 -19.937,20.077 -19.903,20.038 -18.271,18.35 -18.27,18.348 -17.7,17.779 -17.7,16.9 -10.304,9.504 -8.25,9.504 -5.1,6.354 -5.1,6.35 -1.95,3.2 2.258,3.2 v1(8.825,9.767) 11.367,9.767 17.1,15.5 17.1,17.654 20.1,20.654 20.1,23.203 22,25.103 22,28.725 ; v1(3.6,30.1) v1(3.6,36.4) 8.204,41.004 15.696,41.004 19.975,36.725 19.975,34.725 22.9,31.8 22.9,29.971 22,29.071 22,27
LED_K.0: IC2.11 R3.1 | length 5.4
  Top Layer w0.25: R3.1@2.133,25.875 1.945,25.573 1.945,25.556 2.008,24.639 2.9,23.747 2.9,21.839 IC2.11@2.263,21.202
LED_K.1: IC2.12 R6.1 | length 6.5
  Top Layer w0.25: R6.1@0,26.25 0,25 0.325,24.675 1.25,24.675 2.425,23.5 2.425,22.071 IC2.12@1.909,21.556
LED_K.2: IC2.13 R9.1 | length 6.7
  Top Layer w0.25: R9.1@-2.133,25.875 -0.433,24.175 1.075,24.175 1.881,23.369 1.954,23.296 1.954,22.308 1.768,22.121 IC2.13@1.556,21.909
LED_K.3: IC2.18 R4.1 | length 5.1
  Top Layer w0.25: R4.1@-5.41,23.125 -5.1,23.125 -4.725,23.5 -1.732,23.5 IC2.18@-0.849,22.616
LED_K.4: IC2.19 R7.1 | length 6.1
  Top Layer w0.25: R7.1@-6.151,21.09 -4.191,23.05 -1.989,23.05 IC2.19@-1.202,22.263
LED_K.5: IC2.20 R10.1 | length 7.3
  Top Layer w0.25: R10.1@-6.151,18.91 -5.45,19.612 -5.45,20.5 cw(c-5.2,20.5) -5.445,20.55 -5.275,21.375 -4.05,22.6 -2.246,22.6 IC2.20@-1.556,21.909
LED_K.6: IC2.21 R5.1 | length 8
  Top Layer w0.25: R5.1@-5.41,16.875 -5.324,16.961 -5.324,17.651 -5.05,17.925 -5.05,20.573 cw(c-4.8,20.573) -5.045,20.623 -4.999,20.842 cw(c-4.755,20.792) -4.932,20.968 -3.775,22.125 -2.479,22.125 IC2.21@-1.909,21.556
LED_K.7: IC2.22 R8.1 | length 8.9
  Top Layer w0.25: R8.1@-4.018,15.215 -4.018,15.628 -3.725,15.921 -3.725,17.275 -4.673,18.223 -4.673,20.535 cw(c-4.433,20.463) -4.641,20.602 -4.631,20.618 cw(c-4.423,20.479) -4.627,20.623 -3.575,21.675 -2.736,21.675 IC2.22@-2.263,21.202
LED_K.8: IC2.25 R12.1 | length 6.1
  Top Layer w0.25: IC2.25@-2.97,19.505 -3.45,19.025 -3.45,18.75 -2.5,17.8 -2.5,15.975 -2.133,15.608 R12.1@-2.133,14.125
NetD1_1: D1.1 D4.1 D7.1 D10.1 R5.2 | length 90
  Top Layer w0.25: D10.1@-23.334,29.663 -23.731,29.663 -23.879,29.515 -23.879,28.975 -23.354,28.45 -22.496,28.45 -21.15,29.796 -21.15,35.145 -17.432,38.863 ; D7.1@-17.834,39.663 -17.834,39.266 -17.432,38.863 ; v1(1.7,31.5) 0.012,31.5 -0.334,31.846 D1.1@-0.334,32.163 -1.463,32.163 -1.9,32.6 -1.9,33.6 -5.234,36.934 D4.1@-5.234,38.863 -6.863,38.863 -8.5,40.5 -14.6,40.5 -16.237,38.863 -17.432,38.863
  Top Layer w0.254: R5.2@-6.71,16.125 -6.71,15.742 -6.4,15.433 -6.4,12.103 -2.897,8.6 2.597,8.6 10.2,16.203 10.2,27.597 4.997,32.8 v1(2.3,32.8)
  Bottom Layer w0.254: v1(1.7,31.5) 2.3,32.1 v1(2.3,32.8)
NetD1_2: D1.2 D4.2 D7.2 D10.2 R8.2 | length 87.1
  Top Layer w0.25: v1(-23.1,29) -23.062,29.038 -22.84,29.038 -22.674,29.205 D10.2@-22.674,29.663 ; D7.2@-17.174,39.663 -16.337,39.663 -16.098,39.902 v1(-16.098,40.55) ; R8.2@-4.982,14.065 -5.7,13.348 -5.7,12.287 -2.638,9.225 2.338,9.225 9.575,16.462 9.575,27.338 4.75,32.163 2.937,32.163 v1(2.9,32.2) ; D4.2@-4.574,38.863 -4.574,37.528 -4.3,37.254 v1(-4.3,37.2) ; D1.2@0.326,32.163 v1(1.3,32.163)
  Bottom Layer w0.25: v1(-23.1,29) -23.1,31.7 -19.608,35.192 -19.608,38.692 -17.7,40.6 v1@-16.1,40.6 ; v1(-16.098,40.55) -6.75,40.55 -5.8,39.6 -5.8,38.7 v1(-4.3,37.2) ; v1@-4.3,37.165 0.702,32.163 v1(1.3,32.163) 1.3,33 1.65,33.35 2.55,33.35 2.9,33 v1(2.9,32.2)
NetD1_3: D1.3 D4.3 D7.3 D10.3 R12.2 | length 76.9
  Top Layer w0.25: D10.3@-22.674,30.323 -22.077,30.323 -21.846,30.554 -21.846,35.454 -19.6,37.7 -19.6,39.6 -18.4,40.8 -17.312,40.8 -17.166,40.654 ; D7.3@-17.174,40.323 -17.173,40.358 -17.166,40.545 -17.166,40.654 ; R12.2@-2.647,12.715 -3.55,11.812 -3.55,10.95 -2.4,9.8 2.1,9.8 9,16.7 9,27.1 4.5,31.6 3.777,31.6 ; D1.3@0.326,32.823 0.326,33.254 0.18,33.4 -0.8,33.4 -3.6,36.2 -3.6,39 -4.123,39.523 D4.3@-4.574,39.523 -4.574,39.974 -4.899,40.299 -5.744,41.1 -16.719,41.1 -17.166,40.654
  Top Layer w0.254: D1.3@0.326,32.823 1.477,32.823 2.7,31.6 3.777,31.6
NetD2_1: D2.1 D5.1 D8.1 D11.1 R3.2 | length 72.3
  Top Layer w0.25: v1(-15.5,21.6) -16.4,20.7 -18.8,20.7 -19.5,20 -19.5,18.7 -19.174,18.374 -18.845,18.374 D2.1@-18.834,18.363 -18.834,17.334 -18.4,16.9 -17,16.9 -11.194,11.094 -11.194,9.594 -10.763,9.163 D5.1@-10.334,9.163 -10.334,8.634 -10.009,8.309 -9.936,8.236 -9.825,8.236 -8.729,8.271 -6.971,8.271 -0.598,1.898 -0.369,1.898 D8.1@-0.334,1.863 -0.334,1.446 -0.188,1.3 0.678,1.3 8.541,9.163 D11.1@9.666,9.163 ; v1(-15.5,22.8) -12.697,22.8 -5.197,30.3 1.169,30.3 2.669,28.8 2.669,27.307 R3.2@2.647,27.285
  Bottom Layer w0.25: v1(-15.5,21.6) v1(-15.5,22.8)
NetD2_2: D2.2 D5.2 D8.2 D11.2 R6.2 | length 71.6
  Top Layer w0.25: v1(-20.124,19.366) -20.124,20.176 -19,21.3 -16.8,21.3 -15.9,22.2 -12.449,22.2 -4.949,29.7 -0.841,29.7 0,28.859 R6.2@0,27.75 ; v1(-18.258,17.536) -18.258,17.59 -18.174,17.675 D2.2@-18.174,18.363 ; D5.2@-9.674,9.163 -8.817,9.163 -8.554,8.9 v1(-8.5,8.9) ; D8.2@0.326,1.863 0.328,1.865 0.71,1.865 0.856,2.012 0.856,2.256 v1(1.196,2.596) ; D11.2@10.326,9.163 v1(10.916,9.163)
  Bottom Layer w0.25: v1@-20.124,19.32 -18.812,18.008 -18.73,18.008 v1(-18.258,17.536) ; v1@-18.284,17.51 -18.284,16.584 -10.575,8.875 -8.525,8.875 v1(-8.5,8.9) -2.2,2.6 0.678,2.6 v1(1.196,2.596) ; v1@1.198,2.6 2.6,2.6 9.163,9.163 v1(10.916,9.163)
NetD2_3: D2.3 D5.3 D8.3 D11.3 R9.2 | length 61.1
  Top Layer w0.25: D2.3@-18.174,19.023 -17.723,19.023 -17.5,18.8 ; -14.7,21.6 -17.5,18.8 ; D8.3@0.326,2.523 0.326,2.874 ; D11.3@10.326,9.823 10.326,10.174 10,10.5 8.7,10.5 8.2,10 8.2,9.722 1.678,3.2 0.652,3.2 0.326,2.874 ; -17.5,18.8 -17.5,18.1 -11.416,12.016 -10.284,12.016 -9.674,11.406 D5.3@-9.674,9.823 -7.623,9.823 -2.3,4.5 -1.3,4.5 0.326,2.874
  Top Layer w0.254: -14.7,21.6 -12.2,21.6 -4.7,29.1 -3.5,29.1 -2.647,28.247 R9.2@-2.647,27.285
NetD3_1: D3.1 D6.1 D9.1 D12.1 R4.2 | length 88
  Top Layer w0.25: R4.2@-6.71,23.875 -6.71,23.866 -9.3,21.275 -9.3,12.457 -3.643,6.8 3.343,6.8 v1(11.993,15.45) ; D12.1@4.566,38.863 4.576,38.852 4.576,38.524 4.9,38.2 6.1,38.2 8.3,40.4 14.4,40.4 15.137,39.663 D9.1@17.166,39.663 17.176,39.652 17.176,39.324 18.141,38.359 19.641,38.359 21.096,36.904 21.096,30.537 21.97,29.663 ; v1(13.8,17.2) 16.652,17.2 17.826,18.374 ; D3.1@18.166,18.363 18.155,18.374 17.826,18.374 ; D6.1@22.666,29.663 21.97,29.663 ; 17.826,18.374 17.6,18.6 17.6,21.7 21.97,26.07 21.97,29.663
  Bottom Layer w0.25: v1@12.1,15.5 v1(13.8,17.2)
NetD3_2: D3.2 D6.2 D9.2 D12.2 R7.2 | length 89.3
  Top Layer w0.25: R7.2@-7.629,21.35 -7.629,21.33 -8.8,20.159 -8.8,12.806 -3.394,7.4 3.094,7.4 11.744,16.05 17.717,16.05 v1(17.733,16.067) ; D12.2@5.226,38.863 5.904,38.863 6.1,39.06 v1(6.1,39.804) ; v1(17.704,17.4) 17.708,17.404 18.304,17.404 18.826,17.926 D3.2@18.826,18.363 ; D9.2@17.826,39.663 18.337,39.663 18.562,39.438 18.562,39.013 v1(18.6,38.975) ; v1(22.575,28.725) 22.613,28.763 22.863,28.763 23.1,29 23.326,29.226 D6.2@23.326,29.663
  Bottom Layer w0.25: v1(6.1,39.804) 6.794,40.498 7.896,41.6 15.975,41.6 v1(18.6,38.975) 20.575,37 20.575,35.025 23.5,32.1 23.5,29.65 v1(22.575,28.725) 22.575,24.829 20.7,22.954 20.7,20.4 v1@17.702,17.402 ; v1(17.704,17.4) 17.719,17.385 17.719,16.081 v1(17.733,16.067)
NetD3_3: D3.3 D6.3 D9.3 D12.3 R10.2 | length 81.4
  Top Layer w0.25: R10.2@-7.629,18.65 -7.629,12.483 -3.146,8 2.846,8 11.496,16.65 18.133,16.65 18.798,17.316 19.204,17.721 19.218,17.736 19.382,18.078 19.407,18.129 19.407,18.877 19.26,19.023 D3.3@18.826,19.023 18.826,21.926 22.6,25.7 22.6,27.7 23.9,29 23.9,30.177 23.754,30.323 D6.3@23.326,30.323 23.326,31.174 21.7,32.8 21.7,37.3 19.204,39.796 18.677,40.323 D9.3@17.826,40.323 17.826,40.858 17.68,41.004 6.304,41.004 5.226,39.926 5.226,39.558 D12.3@5.226,39.523
NetIC1_1: IC1.1 L1.2 | length 1.4
  Top Layer w0.3: IC1.1@14.095,31.925 L1.2@14.954,32.784
  Top Layer w0.35: L1.2@14.954,32.784 L1.2@15.166,32.784
NetIC1_5: IC1.5 R15.2 | length 1.6
  Top Layer w0.3: R15.2@11.13,29.77 11.13,29.88 IC1.5@12.15,30.9